# EAGLE board avr (EAGLE 6.1)
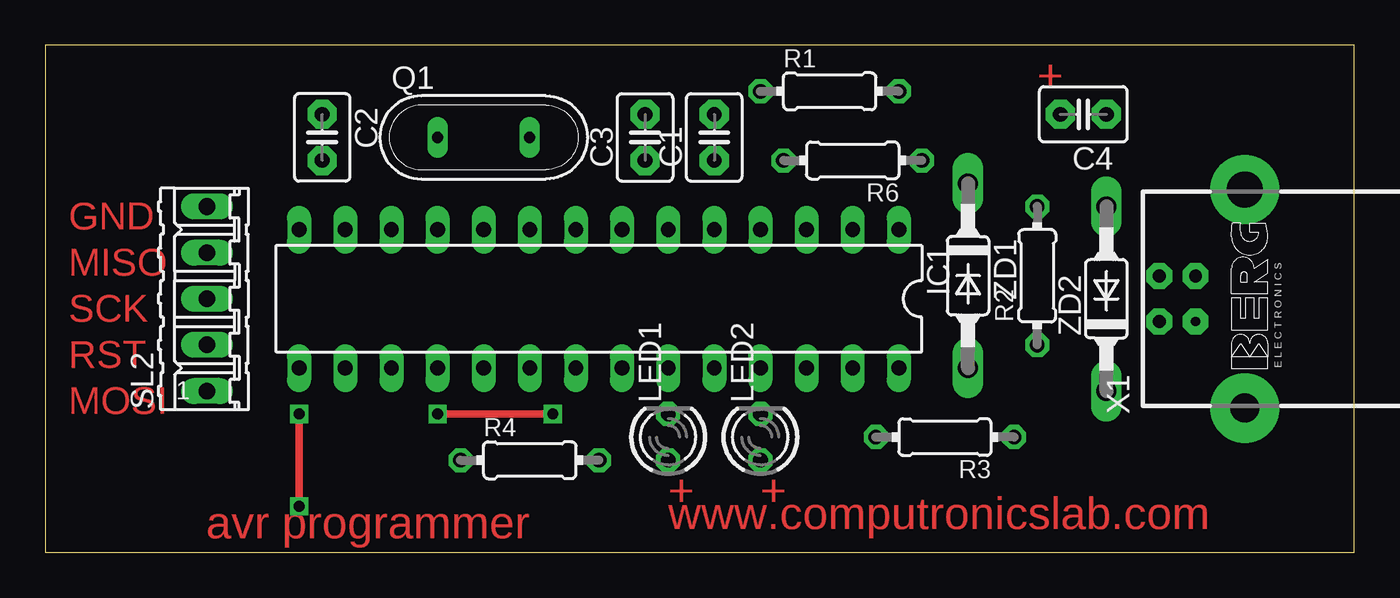
[diagram p0: board, top side]
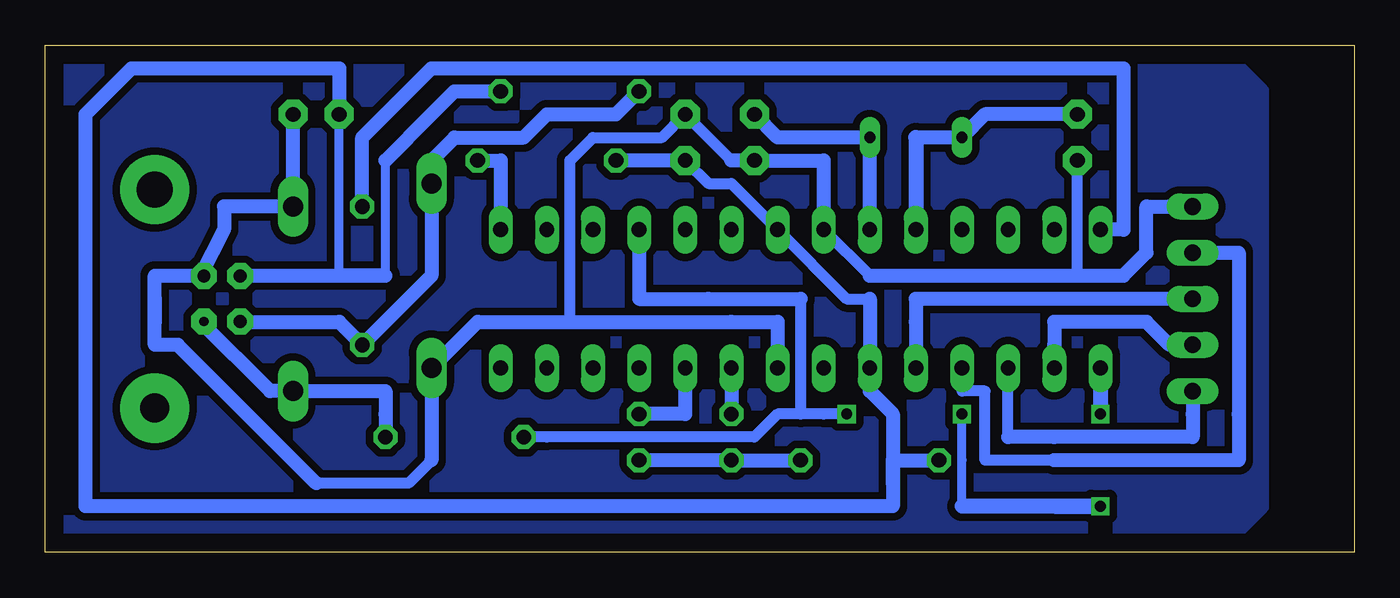
[diagram p1: board, bottom side, seen from below]

Size 72.06 x 27.93 mm. Coordinates in mm from the lower left corner, seen from the top.
Outline: 0,0 72.06,0 72.06,27.93 0,27.93 0,0
Copper layers (1*16): Top 0.035mm / dielectric 1.5mm / Bottom 0.035mm
Design rules: minimum track width 30mil, minimum drill 24mil, track to track 8mil, track to pad 8mil, pad to pad 8mil, via to via 8mil, smd to smd 8mil, copper to edge 40mil, drill to drill 8mil, minimum pad ring 10mil, minimum via ring 8mil, stop-mask expansion 4mil, vias tented up to drill 0mil, thermal gap 10mil

## Footprints (pad centres in the part's own frame; a part is rotated, then mirrored left to right if it is on the bottom)
C2.5-3 = drill 0.813 pad 1.6 octagon: 1 -1.27,0; 2 1.27,0
DIL28-3 = drill 0.813 long: 1 -16.51,-3.81; 2 -13.97,-3.81; 3 -11.43,-3.81; 4 -8.89,-3.81; 5 -6.35,-3.81; 6 -3.81,-3.81; 7 -1.27,-3.81; 8 1.27,-3.81; 9 3.81,-3.81; 10 6.35,-3.81; 11 8.89,-3.81; 12 11.43,-3.81; 13 13.97,-3.81; 14 16.51,-3.81; 15 16.51,3.81; 16 13.97,3.81; 17 11.43,3.81; 18 8.89,3.81; 19 6.35,3.81; 20 3.81,3.81; 21 1.27,3.81; 22 -1.27,3.81; 23 -3.81,3.81; 24 -6.35,3.81; 25 -8.89,3.81; 26 -11.43,3.81; 27 -13.97,3.81; 28 -16.51,3.81
LED3MM = drill 0.813 octagon: A -1.27,0; K 1.27,0
QS = drill 0.61 long: 1 -2.54,0; 2 2.54,0
0204/7 = drill 0.813 octagon: 1 -3.81,0; 2 3.81,0
05P = drill 0.914 long: 1 -5.08,0; 2 -2.54,0; 3 0,0; 4 2.54,0; 5 5.08,0
PN61729-S = drill 0.7 pad 1.422 octagon: 1 1.25,4.71; 2 -1.25,4.71; 4 1.25,2.71 | drill 0.5 pad 1.422 octagon: 3 -1.25,2.71 | drill 1.6 pad 3.81: S1 -6.02,0 | drill 2 pad 3.81: S2 6.02,0
SOD81 = drill 1.118 long: A 5.08,0; C -5.08,0

## Placement (x,y rotation side)
C1  0.1uf  [C2.5-3]  36.83,22.86 90 top
C2  22pf  [C2.5-3]  15.24,22.86 270 top
C3  22pf  [C2.5-3]  33.02,22.86 90 top
C4  10uf  [C2.5-3]  57.15,24.13 180 top
IC1  QT9701BD  [DIL28-3]  30.48,13.97 180 top
LED1  5mm  [LED3MM]  34.29,6.35 90 top
LED2  5mm  [LED3MM]  39.37,6.35 90 top
Q1  12 MHZ  [QS]  24.13,22.86 0 top
R1  2.6k  [0204/7]  43.18,25.4 0 top
R2  70E  [0204/7]  54.61,15.24 90 top
R3  70E  [0204/7]  49.53,6.35 180 top
R4  1K  [0204/7]  26.67,5.08 0 top
R6  10K  [0204/7]  44.45,21.59 180 top
SL2  [05P]  8.89,13.97 90 top
X1  PN61729-S  [PN61729-S]  66.04,13.97 90 top
ZD1  3.6v  [SOD81]  50.8,15.24 270 top
ZD2  3.6v  [SOD81]  58.42,13.97 90 top

## Library data of the parts
C1-C4 = capacitor-wima
IC1 = quantum-research-group; OC_FARNELL: unknown; OC_NEWARK: unknown
LED1 LED2 = led
Q1 = special
R1-R4 R6 = resistor
SL2 = con-amp-quick; OC_FARNELL: unknown; OC_NEWARK: unknown
X1 = con-berg; OC_FARNELL: unknown; OC_NEWARK: unknown
ZD1 ZD2 = diode

## Nets
N$1: C3.2 IC1.9 Q1.2
N$2: C2.1 IC1.10 Q1.1
N$3: IC1.1 R6.1
N$4: R1.1 R2.1 X1.2 ZD1.C
N$5: C1.2 C2.2 C3.1 C4.1 IC1.8 IC1.22 SL2.5 X1.4 ZD1.A ZD2.A
N$6: IC1.14 R2.2
N$7: R3.1 X1.3 ZD2.C
N$8: IC1.4 IC1.15 R3.2
N$9: C1.1 C4.2 IC1.7 IC1.20 R1.2 R4.1 R6.2 X1.1
N$10: IC1.24 LED2.K
N$13: IC1.23 LED1.K
N$16: IC1.17 SL2.1
N$17: IC1.16 SL2.2
N$18: IC1.19 SL2.3
N$19: IC1.18 SL2.4
N$20: IC1.25
N$21: LED1.A LED2.A R4.2

## Tracks (layer width: path | path; a pad name or v marks a point on that pad's centre or on a via)
N$1
  Bottom 0.762: IC1.9 Q1.2 31.75,22.86 C3.2
N$2
  Bottom 0.762: C2.1 20.32,24.13 Q1.1 24.13,22.86
  Bottom 0.813: 24.13,22.86 IC1.10
N$3
  Bottom 0.762: IC1.1 46.99,21.59 R6.1
N$4
  Bottom 0.762: X1.2 60.96,12.7 55.88,12.7 R2.1 50.8,15.24 ZD1.C 50.8,21.59 49.53,22.86 45.72,22.86 44.45,24.13 40.64,24.13 R1.1
N$5
  Bottom 0.61: IC1.8 26.67,15.24 | 15.24,15.24 C2.2 | 34.29,21.59 C1.2 38.1,22.86 41.91,22.86 43.18,21.59 43.18,12.7 | 57.15,3.81 52.07,3.81 50.8,5.08
  Bottom 0.762: IC1.8 29.21,20.32 29.21,21.59 C3.1 34.29,21.59 | SL2.5 10.16,19.05 11.43,19.05 11.43,16.51 12.7,15.24 13.97,15.24 15.24,15.24 26.67,15.24 | 63.5,15.24 62.23,17.78 62.23,19.05 59.69,19.05 ZD2.A C4.1 | 63.5,15.24 X1.4 63.5,15.24 | IC1.22 31.75,11.43 31.75,12.7 34.29,12.7 43.18,12.7 48.26,12.7 ZD1.A 50.8,5.08 | 66.04,12.7 66.04,13.97 | 66.04,13.97 66.04,15.24 63.5,15.24 | 66.04,12.7 66.04,11.43 64.77,11.43 57.15,3.81 | 66.04,12.7 66.04,13.97 | 66.04,13.97 66.04,12.7
N$6
  Bottom 0.762: IC1.14 12.7,17.78 12.7,21.59 12.7,26.67 50.8,26.67 54.61,22.86 R2.2
N$7
  Bottom 0.762: R3.1 53.34,7.62 53.34,8.89 57.15,8.89 ZD2.C 59.69,8.89 63.5,12.7 X1.3
N$8  (via drill 0.6)
  Top 0.406: v13.97,7.62 v13.97,2.54 | v21.59,7.62 v27.94,7.62
  Bottom 0.508: 21.59,2.54 21.59,5.08 v21.59,7.62
  Bottom 0.61: R3.2 44.45,6.35 33.02,6.35 31.75,7.62 | 30.48,7.62 30.48,8.89 30.48,13.97 | v27.94,7.62 29.21,7.62 30.48,7.62 | 30.48,7.62 31.75,7.62 | 30.48,7.62 31.75,7.62
  Bottom 0.762: 30.48,13.97 35.56,13.97 39.37,13.97 IC1.4
  Bottom 0.813: IC1.15 v13.97,7.62 | v13.97,2.54 16.51,2.54 | 16.51,2.54 v13.97,2.54 | v13.97,2.54 16.51,2.54 | 16.51,2.54 21.59,2.54
N$9
  Bottom 0.508: 53.34,15.24 53.34,21.59 | 55.88,15.24 C4.2
  Bottom 0.61: C1.1 35.56,20.32 34.29,20.32 IC1.7 27.94,13.97 26.67,13.97
  Bottom 0.762: R1.2 49.53,25.4 50.8,24.13 53.34,21.59 | 55.88,15.24 60.96,15.24 X1.1 | 55.88,15.24 53.34,15.24 55.88,15.24 | 25.4,7.62 26.67,8.89 IC1.20 26.67,13.97 | 25.4,7.62 25.4,3.81 | 25.4,3.81 25.4,5.08 R4.1 | C1.1 R6.2 | C4.2 55.88,26.67 58.42,26.67 63.5,26.67 67.31,26.67 68.58,25.4 69.85,24.13 69.85,21.59 69.85,2.54 30.48,2.54 25.4,2.54 25.4,3.81 | 25.4,7.62 25.4,3.81
N$10
  Bottom 0.762: IC1.24 36.83,8.89 36.83,7.62 LED2.K
N$11
  pour Bottom (isolate 0.406): 10.16,0 7.62,0 5.08,2.54 5.08,25.4 7.62,27.94 69.85,27.94 72.39,25.4 72.39,2.54 69.85,0
N$13
  Bottom 0.762: IC1.23 LED1.K
N$16
  Bottom 0.61: 19.05,6.35 IC1.17
  Bottom 0.762: 19.05,6.35 16.51,6.35 8.89,6.35 8.89,7.62 SL2.1
N$17
  Bottom 0.762: IC1.16 16.51,11.43 16.51,12.7 13.97,12.7 11.43,12.7 10.16,11.43 SL2.2
N$18
  Bottom 0.762: IC1.19 24.13,12.7 24.13,13.97 20.32,13.97 SL2.3
N$19
  Bottom 0.61: 16.51,5.08 20.32,5.08 20.32,8.89 21.59,8.89 IC1.18
  Bottom 0.762: 16.51,5.08 6.35,5.08 6.35,7.62 6.35,16.51 SL2.4
N$21
  Bottom 0.762: R4.2 LED1.A LED2.A

## Text on the board
Top: + | GND | MISO | SCK | RST | MOSI | avr programmer | + | + | www.computronicslab.com